# Altium PCB PulseOx_0_PCB.PcbDoc
Units mil, origin at the board's own origin, x right, y up, seen from the top; angles counter-clockwise.
Board outline 3125 x 1501 mil, 2 copper layers (Top Layer, Bottom Layer), stack 61.756 mil thick; 62 components, 46 nets, 194 pads, 48 vias.
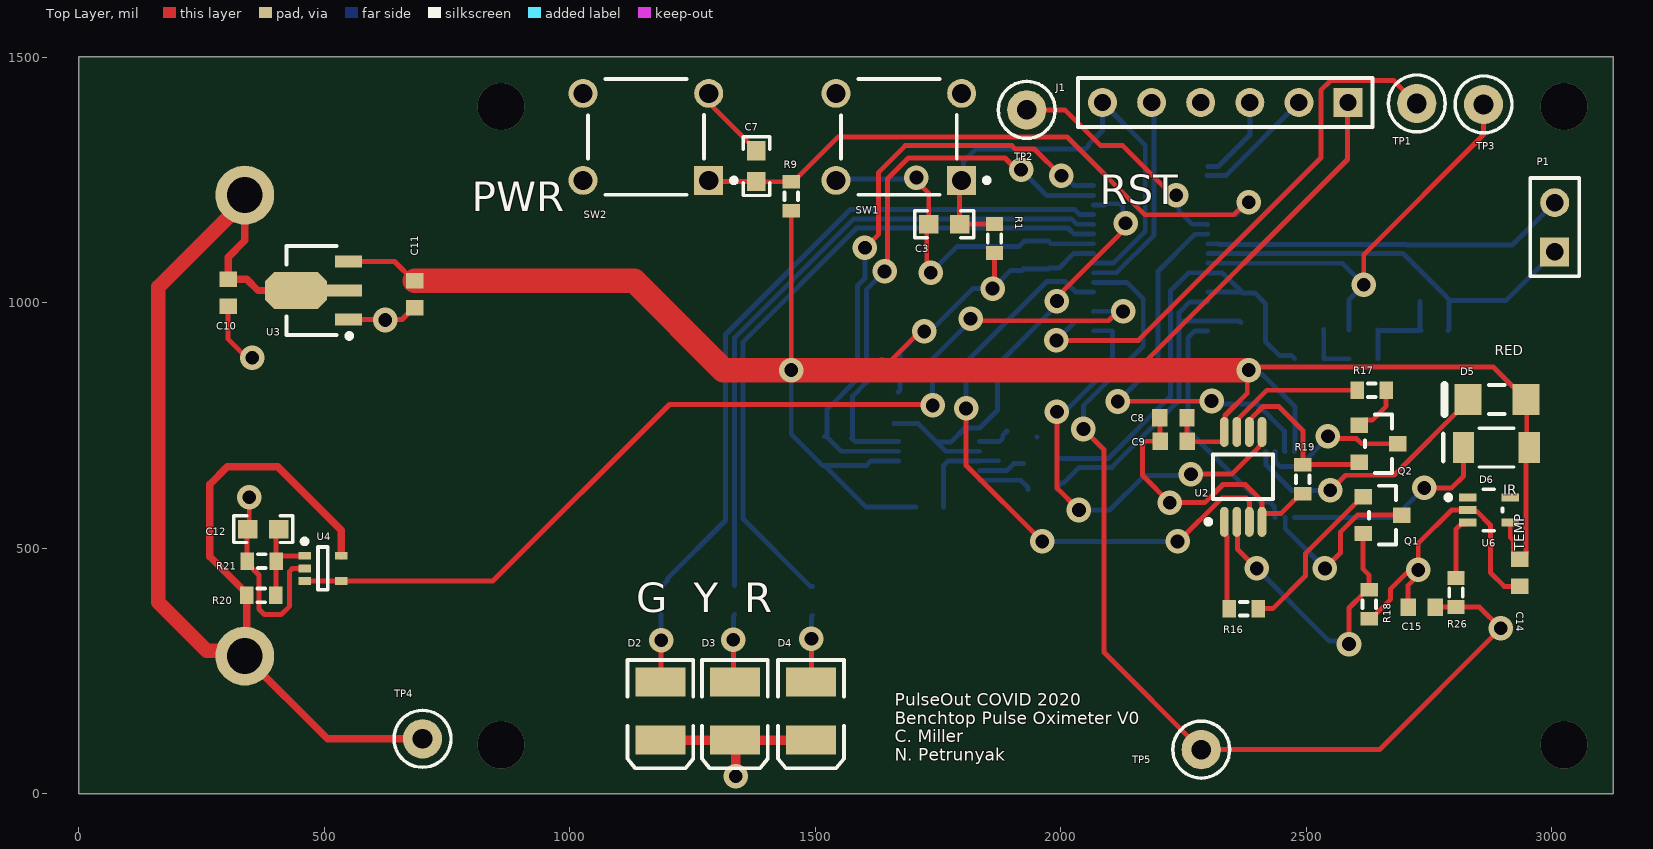
[diagram p0: Top Layer view]
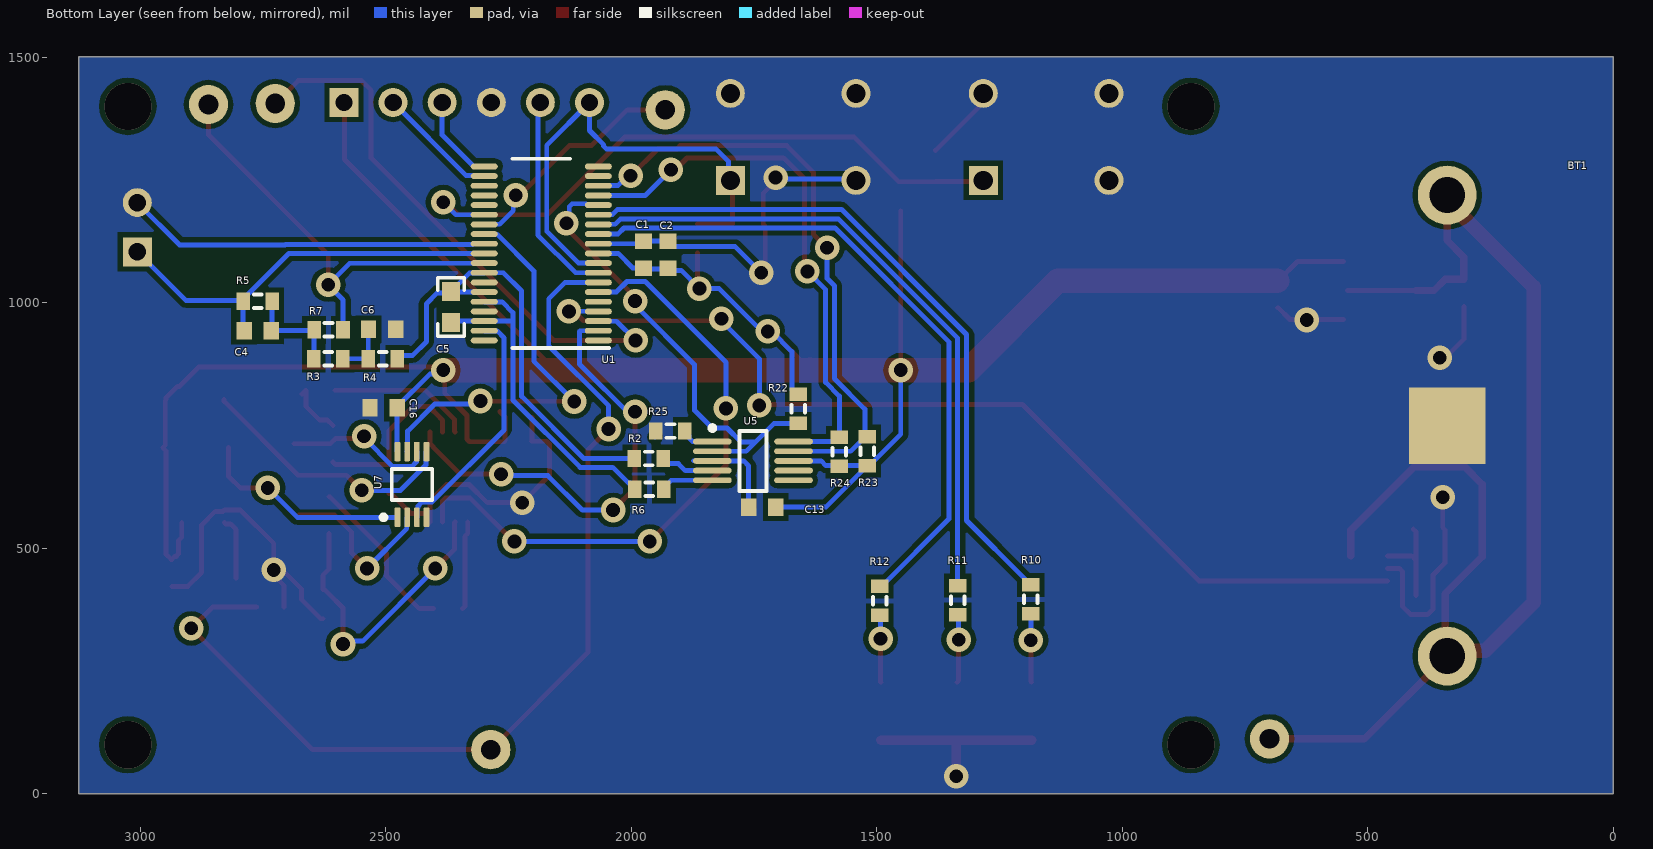
[diagram p1: Bottom Layer view, seen from below]

## Layer stack, top to bottom
Top Solder: solder mask 1, SM-001, Dk 4
Top Layer: signal copper 1.378
Dielectric 1: core 59, Core-043, Dk 4.3
Bottom Layer: signal copper 1.378
Bottom Solder: solder mask 1, SM-001, Dk 4

## Board outline
0,0 0,1501 3125,1501 3125,0

## Design rules (kind name [scope] priority, off if disabled: settings)
Clearance [All] p1: gap=10 ignorepadtopadclearanceinfootprint=FALSE except(0: Arc-Hole Track-Hole SMDPad-Hole THPad-Hole Via-Hole Fill-Hole Poly-Hole Region-Hole Text-Hole; 2: SMDPad-SMDPad; 6: Arc-SMDPad Track-SMDPad; 8: Arc-Arc Arc-Track Track-Track)
PlaneConnect [All] p1: planeconnectstyle=Direct reliefexpansion=20 reliefentries=4 reliefconductorwidth=10 reliefairgap=10
PolygonConnect [All] p1: connectstyle=Direct reliefconductorwidth=10 reliefentries=4 polygonreliefangle="90 Angle" airgapwidth=10
RoutingVias [All] p1: holewidth=12 width=12 viastyle="Through Hole" minholewidth=8 minwidth=12 maxholewidth=8 maxwidth=12
SolderMaskExpansion [All] p1: expansion=4 istentingtop=FALSE
Width [All] p1: maxlimit=50 minlimit=6 preferedwidth=10 minimp=50.000000 maximp=50.000000 favimp=50.000000
29 further rules are at their usual default settings.

## Classes and differential pairs
component class "TX Path": C8 C9 C16 D5 D6 Q1 Q2 R16 R17 R18 R19 U2 U7
component class Power: BT1 C10 C11 C12 R20 R21 TP4 U3 U4
component class Perpherials: C13 C14 C15 R22 R23 R24 R25 R26 TP5 U5 U6
component class Microcontroller: C1 C2 C3 C4 C5 C6 C7 D2 D3 D4 J1 P1 R1 R2 R3 R4 R5 R6 R7 R9 R10 R11 R12 SW1 SW2 TP1 TP2 TP3 U1

## Components (designator, comment, footprint, x,y, rotation, side; value= is the part's Value field where it differs from the comment)
BT1 "3052-2" 3025-2 338,750 r270 bottom locked
C1 "Cap Semi" 1608[0603] 1975,1098 r270 bottom value=0.1uF
C2 "Cap Semi" 1608[0603] 1925,1097.56 r270 bottom value=10uF
C3 "Cap Semi" 0603 1762.5,1160 r0 top value=1.1nF
C4 "Cap Semi" 1608[0603] 2760.87,943.22 r0 bottom value=0.1uF
C5 "Cap Semi" 0603 2367,991.5 r90 bottom value=DNP
C6 "Cap Semi" 1608[0603] 2507.44,946 r180 bottom value=1uF
C7 "Cap Semi" 0603 1380,1278.5 r270 top value=1.1nF
C8 "Cap Semi" 1608[0603] 2229.44,766.03 r0 top value=0.1uF
C9 "Cap Semi" 1608[0603] 2230.44,718.03 r0 top value=0.1uF
C10 "Cap Semi" 1608[0603] 304,1020.44 r90 top value=0.1uF
C11 "Cap Semi" 1608[0603] 684,1017.44 r90 top value=0.1uF
C12 "Cap Semi" 0603 375.66,539 r0 top value=100pF
C13 "Cap Semi" 1608[0603] 1733,584 r180 bottom value=0.1uF
C14 "Cap Semi" 1608[0603] 2935,450 r90 top value=0.1uF
C15 "Cap Semi" 1608[0603] 2735,380 r0 top value=DNP
C16 "Cap Semi" 1608[0603] 2504.44,786 r180 bottom value=0.1uF
D2 "GREEN" 3.5X2.8X1.9 1184.48,168.23 r270 top
D3 "YELLOW" 3.5X2.8X1.9 1336.22,168.23 r270 top
D4 "RED" 3.5X2.8X1.9 1491.22,168.23 r270 top
D5 "BR1102W-TR" STEC-1102W_V 2888,803.13 r180 top
D6 "IR LED" 1206_180 2887,705 r180 top
J1 "Header 6" HDR1X6 2585,1408 r180 top
P1 "Photodiode input" HDR1X2 3006,1104 r90 top
Q1 "FDV301N" FP-318-08-MFG 2655,567.56 r0 top
Q2 "FDV301N" FP-318-08-MFG 2647.08,713 r0 top
R1 "Res3" J1-0603 1865,1131 r270 top value=47k
R2 "Res3" J1-0603 1964,683 r0 bottom value=DNP
R3 "Res3" J1-0603 2617,886 r180 bottom value=4.02k
R4 "Res3" J1-0603 2506,886 r0 bottom value=0
R5 "Res3" J1-0603 2760.87,1003.22 r0 bottom value=2K
R6 "Res3" J1-0603 1963,620 r0 bottom value=DNP
R7 "Res3" J1-0603 2616.47,945 r180 bottom value=0
R9 "Res3" J1-0603 1451,1217 r270 top value=47k
R10 "Res3" J1-0603 1186,396 r90 bottom value=10
R11 "Res3" J1-0603 1335,394.53 r90 bottom value=64.9
R12 "Res3" J1-0603 1494,393 r90 bottom value=64.9
R16 "Res3" J1-0603 2373,377 r180 top value=100
R17 "Res3" J1-0603 2633,822 r180 top value=100
R18 "47.5" J1-0603 2628,386 r90 top
R19 "11.5" J1-0603 2493,641 r90 top
R20 "Res3" J1-0603 371.69,404 r180 top value=10M
R21 "Res3" J1-0603 372.16,474 r0 top value=10M
R22 "Res3" J1-0603 1660,784 r270 bottom value=1k
R23 "Res3" J1-0603 1519,698 r90 bottom value=1k
R24 "Res3" J1-0603 1576,696.47 r90 bottom value=1k
R25 "Res3" J1-0603 1920,739 r0 bottom value=1k
R26 "Res3" J1-0603 2805,410 r90 top value=0
SW1 "1825910-6" TECO-1825910-6_V 1670.12,1338 r180 top
SW2 "1825910-6" TECO-1825910-6_V 1155,1338 r180 top
TP1 "5002" Keystone5002 2725,1406 r0 top value=White
TP2 "5002" Keystone5002 1930.61,1393 r0 top value=White
TP3 "5002" Keystone5002 2861,1404 r0 top value=White
TP4 "5002" Keystone5002 700,112 r0 top value=White
TP5 "5002" Keystone5002 2286,90 r0 top value=White
U1 "MSP430FR2355TDBT" DBT0038A_N 2183.14,1100.57 r0 bottom locked value=Value
U2 "LMV358IDGKR" DGK0008A_M 2371.36,645.46 r90 top
U3 "MCP1700T-5002E/MB" SOT-89-MB3_N 474,1025 r180 top
U4 "MIC920YC5" X5+1_L 497.16,459 r0 top
U5 "ADS1115IDGST" TI-DGS10_M 1752,678 r180 bottom
U6 "TMP235A4DCKR" FP-DCK0005A-MFG 2872,578 r0 top
U7 "SN74LVC2G66DCUR" DCU0008A_M 2446.45,630.07 r90 bottom

## Footprints (in the part's own frame and the unit in brackets; to place one, negate y for a bottom-side part, rotate by r counter-clockwise, add the part's x,y. Pads: shape width x height; smd on the part's side, far side on the other; paste and mask are expansions set on the pad)
3.5X2.8X1.9 [mm] "SM LED; 2 C-Bend Leads; Body 3.5 x 2.8 x 1.9 mm, inc leads (LxWxH typ)"
  rect 1.5x2.6 smd: 1(-1.5,0) 2(1.5,0)
  silkscreen extent -2.65,-1.7 2.95,1.7
0603 [mm] "0603 from SM-752 data"
  rect 1x0.95 smd: 1(-0.8,0) 2(0.8,0)
  silkscreen extent -1.52,-0.69 1.52,0.69, body extent -0.87,-0.47 0.87,0.47, height 1
1206_180 [mm] "1206_180"
  rect 1.1x1.6 smd: 1(-1.7,0) 2(1.7,0)
  silkscreen extent -0.9,-1 0.9,1, body extent -1.75,-0.95 1.75,0.95, height 1.8
1608[0603] [mm] "Chip Capacitor, Body 1.6x0.8mm, IPC High Density"
  rect 0.8x0.9 smd: 1(-0.7,0) 2(0.7,0)
  body extent -0.87,-0.48 0.87,0.48, height 1.3
3025-2 [mil] "BATTERY RETNR COIN 2 CELL PC PIN"
  rect 156x156 smd: 1(0,0)
  round 120 hole 73: 2(-469.5,0) 2(469.5,0)
  body extent -495,-538 508,338, height 327
DBT0038A_N [mm]
  oval 1.4x0.3 smd paste+0 mask+0: 1(-2.95,4.5) 2(-2.95,4) 3(-2.95,3.5) 4(-2.95,3) 5(-2.95,2.5) 6(-2.95,2) 7(-2.95,1.5) 8(-2.95,1) 9(-2.95,0.5) 10(-2.95,0) 11(-2.95,-0.5) 12(-2.95,-1) 13(-2.95,-1.5) 14(-2.95,-2) 15(-2.95,-2.5) 16(-2.95,-3) 17(-2.95,-3.5) 18(-2.95,-4) 19(-2.95,-4.5) 20(2.95,-4.5) 21(2.95,-4) 22(2.95,-3.5) 23(2.95,-3) 24(2.95,-2.5) 25(2.95,-2) 26(2.95,-1.5) 27(2.95,-1) 28(2.95,-0.5) 29(2.95,0) 30(2.95,0.5) 31(2.95,1) 32(2.95,1.5) 33(2.95,2) 34(2.95,2.5) 35(2.95,3) 36(2.95,3.5) 37(2.95,4) 38(2.95,4.5)
  silkscreen extent -3.5,-4.9 1.5,4.9, body extent 0,0 0.25,0.25, height 0.25
DCU0008A_M [mm] "SOP, 8-Leads, Body 2.4x2.1mm, Pitch 0.5mm, IPC Low Density"
  rrect33% 1x0.3 smd: 1(-1.7,0.75) 2(-1.7,0.25) 3(-1.7,-0.25) 4(-1.7,-0.75) 5(1.7,-0.75) 6(1.7,-0.25) 7(1.7,0.25) 8(1.7,0.75)
  silkscreen extent -1.82,-1.05 0.8,1.6, body extent -1.56,-1 1.56,1, height 0.9
DGK0008A_M [mm] "TSOP, 8-Leads, Body 3.1x3.1mm, Pitch 0.65mm, IPC Low Density"
  oval 1.55x0.45 smd: 1(-2.325,0.975) 2(-2.325,0.325) 3(-2.325,-0.325) 4(-2.325,-0.975) 5(2.325,-0.975) 6(2.325,-0.325) 7(2.325,0.325) 8(2.325,0.975)
  silkscreen extent -2.45,-1.55 1.15,1.92, body extent -2.45,-1.5 2.45,1.5, height 0.94
FP-318-08-MFG [mm]
  rect 0.9x0.8 smd paste+0 mask+0: 1(-1,0.95) 2(-1,-0.95) 3(1,0)
  silkscreen extent -0.7,-1.52 0.7,1.52, body extent -1.55,-1.62 1.55,1.62, height 0.25
FP-DCK0005A-MFG [mm]
  rect 0.9x0.4 smd paste-1000 mask+0: 1(-1.1,0.65) 2(-1.1,0) 3(-1.1,-0.65) 4(1.1,-0.65) 5(1.1,0.65)
  silkscreen extent -2.22,-1.07 0.7,1.07, body extent -1.65,-1.33 1.65,1.33, height 0.25
HDR1X2 [mm] "Connector; Header; 2 Position"
  rect 1.5x1.5 hole 0.9: 1(0,0)
  round 1.5 hole 0.9: 2(2.54,0)
  silkscreen extent -1.27,-1.27 3.81,1.27
HDR1X6 [mm] "Connector; Header; 6 Position"
  rect 1.5x1.5 hole 0.9: 1(0,0)
  round 1.5 hole 0.9: 2(2.54,0) 3(5.08,0) 4(7.62,0) 5(10.16,0) 6(12.7,0)
  silkscreen extent -1.27,-1.27 13.97,1.27
J1-0603 [mm] "Chip Resistor, Body 1.6x0.8mm, IPC High Density"
  rect 0.7x0.9 smd: 1(-0.75,0) 2(0.75,0)
  silkscreen extent -0.2,-0.35 0.2,0.35, body extent -0.85,-0.48 0.85,0.48, height 0.9
Keystone5002 [mil]
  round 80 hole 40: 1(0,0)
  silkscreen extent -58,-58 58,58, body extent -49,-49 49,49, height 182
SOT-89-MB3_N [mm] "SOT89, 3-Leads, Body 4.5x2.4 mm, Pitch 1.5mm, Lead Span 4.1mm, IPC Medium Density"
  rect 1.4x0.6 smd: 1(-1.9,1.5) 3(-1.9,-1.5)
  rect 1.8x0.6 smd: 2(-1.7,0)
  oct 3.2x1.9 smd: 2(0.8,0)
  silkscreen extent -2.08,-2.3 1.3,2.47, body extent -1.3,-2.3 1.3,2.3, height 1.6
STEC-1102W_V [mm] "SMD, 2-Leads, Body 3x1.5mm"
  rect 1.4x1.6 smd: 1(-1.5,0) 2(1.5,0)
  silkscreen extent -0.4,-0.75 2.7,0.75, body extent -1.5,-0.75 1.5,0.75, height 1.78
TECO-1825910-6_V [mm] "Switch, 4-Leads, Body 5.99x5.99mm"
  rect 1.5x1.5 hole 0.99: 1(-3.25,2.25)
  round 1.5 hole 0.99: 2(3.25,2.25) 3(-3.25,-2.25) 4(3.25,-2.25)
  silkscreen extent -4.68,-3 3,3, body extent -3,-2.99 2.99,3, height 5
TI-DGS10_M [mm] "SOP, 10-Leads, Body 3x3mm, Pitch 0.5mm, IPC Low Density"
  oval 2x0.3 smd: 1(-2.1,1) 2(-2.1,0.5) 3(-2.1,0) 4(-2.1,-0.5) 5(-2.1,-1) 6(2.1,-1) 7(2.1,-0.5) 8(2.1,0) 9(2.1,0.5) 10(2.1,1)
  silkscreen extent -2.23,-1.55 0.7,1.82, body extent -1.55,-1.55 1.55,1.55, height 1.1
X5+1_L [mm] "SOT353, 5-Leads, Body 2x1.3mm, Pitch 0.65mm, Lead Span 2.1mm, IPC High Density"
  rect 0.65x0.4 smd: 1(-0.95,0.65) 2(-0.95,0) 3(-0.95,-0.65) 4(0.95,-0.65) 5(0.95,0.65)
  silkscreen extent -1.07,-1.1 0.25,1.52, body extent -0.67,-1.1 0.68,1.1, height 1.1

## Part data
BT1: library part 3025-2, "BATTERY RETNR COIN 2 CELL PC PIN", Mfr 1="Keystone Electronics", DigiKey=36-3025-2-ND, Mfr 1 PN=3025-2
C1 C2 C4 C8 C9 C11 C13 C14 C15 C16: "Capacitor (Semiconductor SIM Model)", Voltage=6.3V, LatestRevisionDate=29-May-2009, LatestRevisionNote="IPC-7351 Footprint Added.", PackageDescription="Chip Capacitor", PackageReference=C1206, Published=8-Jun-2000, Publisher="Altium Limited"
  C1 C4 C8 C9 C11 C13 C14 C16: DigiKey=478-06036C104KAT4ACT-ND
  C2: DigiKey=587-6012-1-ND
  C15: DigiKey=DNP
C3 C5 C6 C7 C12: "Capacitor (Semiconductor SIM Model)", LatestRevisionDate=29-May-2009, LatestRevisionNote="IPC-7351 Footprint Added.", PackageDescription="Chip Capacitor", Published=8-Jun-2000, Publisher="Altium Limited"
  C3 C7: DigiKey=490-1452-1-ND, PackageReference=C1206
  C5: DigiKey=DNP, PackageReference=C1206
  C6: DigiKey=399-17700-1-ND, PackageReference=C1206
  C12: DigiKey=478-11846-1-ND, PackageReference=0603
C10: "Capacitor (Semiconductor SIM Model)", Voltage=10V, DigiKey=478-06036C104KAT4ACT-ND, LatestRevisionDate=29-May-2009, LatestRevisionNote="IPC-7351 Footprint Added.", PackageDescription="Chip Capacitor", PackageReference=C1206, Published=8-Jun-2000, Publisher="Altium Limited"
D2 D3 D4: library part LED3, "Typical BLUE SiC LED", DatasheetVersion=16-Apr-2002, LatestRevisionDate=17-Dec-2003, LatestRevisionNote="PCB Footprint replaced.", PackageDescription="SM LED; 2 C-Bend Leads; Body 3.5 x 2.8 x 1.9 mm, inc leads (LxWxH typ)", PackageReference=3.5X2.8X1.9, PackageVersion=16-Apr-2002, Published=8-Jun-2000, Publisher="Altium Limited"
  D2: DigiKey=732-4997-1-ND
  D3: DigiKey=SML-Z14YTT86CCT-ND
  D4: DigiKey=732-5000-1-ND
D5: library part CMP-2000-05961-1, "LED, Red, 647 nm, -30 to 85 degC, 2-Pin SMD, RoHS, Tape and Reel", Emitting Color=Red, Forward Current=30mA, Forward Voltage=2V, Manufacturer="Stanley Electric", Operating Temp Range=-30Cto85C, Operating Temperature Classification=Commercial, Package Description="2-Pin Surface Mounted Device , Body 3 x 1.5 mm", Package Reference=1102W, Package Type=SMD, Power Dissipation=60W, Reverse Voltage=4V, Test Current (It)=20mA, Chip Material=GaAlAs, Datasheet URL=https://datasheet.ciiva.com/34302/1845603-34302809.pdf, Datasheet Version=08/2007, DELETED=Compliant, DigiKey=404-1048-1-ND, Dominant Wave Length=647nm, High Brightness=No, Lens Dimensions=2x1.5x0.9mm, Lum Intensity=33.6mcd, Luminous Intensity=33.6mcd, Main Category=ChipLED, Manufacturer URL=http://www.stanley-electric.com/, Mounting=SurfaceMount, Mounting Technology=SurfaceMount, Number of  Elements=1, Packaging=TapeandReel, Peak Wavelength=660nm, Pin Count=2, Product Depth (mm)=1.5mm, Product Height (mm)=1.5mm, Product Length (mm)=3mm, Rad Hardened=No, Shape Type=Rectangular, Type=Uni-Color, Viewing Angle=70/82deg
D6: library part LED0, "Typical INFRARED GaAs LED", DigiKey=1080-1357-1-ND, LatestRevisionDate=08-Jul-2005, LatestRevisionNote="Mech Layer 1 removed.", PackageDescription="LED; 2 Leads", PackageReference=LED-0, Published=8-Jun-2000, Publisher="Altium Limited"
J1: "Header, 6-Pin", DigiKey=ED7264-06-ND, LatestRevisionDate=17-Jul-2002, LatestRevisionNote="Re-released for DXP Platform.", Publisher="Altium Limited"
P1: library part "Header 2", "Header, 2-Pin", LatestRevisionDate=17-Jul-2002, LatestRevisionNote="Re-released for DXP Platform.", Publisher="Altium Limited"
Q1 Q2: library part CMP-07173-000062-1, "MOSFET N-CH 25V 220MA SOT-23", Continuous Drain Current=0.22A, Drain To Source Breakdown Voltage=25V, Drain To Source Resistance=3.1Ω, Gate To Source Voltage=8V, Input Capacitace At Vds="9.5pF @ 10V", Manufacturer="ON Semiconductor", Max Forward Diode Voltage=1.2V, Max Junction Temp=+150°C, Package=318-08, Power Dissipation=0.35W, Temperature="-55°C to +150°C", Temperature Range Low=-55°C, Typ Forward Diode Voltage=0.8V, Automotive=No, Category=Trans, ComponentLink2Description=Datasheet, ComponentLink2URL=https://www.onsemi.com/pub/Collateral/FDV301N-D.PDF, Depletion Mode=False, Device Class L1="Discrete Semiconductors", Device Class L2=Transistors, Device Class L3=MOSFETs, DigiKey=FDV301NCT-ND, Digikey Description="MOSFET N-CH 25V 220MA SOT-23", Drain To Source Voltage=25V, Footprint Url=https://www.onsemi.com/pub/Collateral/318-08.PDF, Gate Charge At Vgs="0.49nC @ 4.5V", Height=1.11mm, Ipc Land Pattern Name=SOT95P240X100-3, Lead Free=Yes, Manufacturer Part Number=FDV301N, Mouser Description="MOSFET N-Ch Digital", Number Of Channels=1, Number Of N Channels=1, Octopart=https://octopart.com/fdv301n-on+semiconductor-84326713, RoHS=TRUE, Rthja Max=357°C/W, Standoff Height=0.01mm, Temperature Range High=+150°C, Threshold Vgs Max=1.06V, Threshold Vgs Min=0.7V, Transconductance=0.2S, Turn Off Delay Time=3.5ns, Turn On Delay Time=3.2ns
R1 R2 R3 R4 R5 R6 R7 R9 R10 R11 R12 R16 R17 R20 R21 R22 R23 R24 R25 R26: "Resistor", LatestRevisionDate=29-May-2009, LatestRevisionNote="IPC-7351 Footprint Added.", PackageDescription="Chip Resistor", PackageReference=J1-0603, Published=8-Jun-2000, Publisher="Altium Limited"
  R1 R9: DigiKey=311-47KGRCT-ND
  R2 R6: DigiKey=DNP
  R3: DigiKey=RMCF0603FT4K02CT-ND
  R4 R7 R26: DigiKey=311-0.0GRCT-ND
  R5: DigiKey=311-2.00KHRCT-ND
  R10: DigiKey=311-10.0HRCT-ND
  R11 R12: DigiKey=P64.9DBCT-ND
  R16 R17: DigiKey=P100BYCT-ND
  R20 R21: DigiKey=P10MGCT-ND
  R22 R23 R24 R25: DigiKey=311-1.00KHRCT-ND
R18 R19: library part Res3, "Resistor", LatestRevisionDate=29-May-2009, LatestRevisionNote="IPC-7351 Footprint Added.", PackageDescription="Chip Resistor", PackageReference=J1-0603, Published=8-Jun-2000, Publisher="Altium Limited"
  R18: DigiKey=311-47.5HRDKR-ND
  R19: DigiKey=P11.5HCT-ND
SW1 SW2: library part CMP-1684-00021-1, "Tact Switch, SPST-NO, 0.05 A, -35 to 85 degC, 4-Pin THD, RoHS, Bulk", Actuator Color=Black, Contact Rating @ Voltage=0.05A@24VDC, Dielectric Strength=500VAC, Manufacturer="TE Connectivity", Maximum AC Voltage Rating=N/A, Maximum Contact Resistance=100mOhm, Maximum DC Voltage Rating=24V, Minimum Insulation Resistance=100MOhm, Operating Temperature=-35to85C, Package Description="4-Pin Through Hole Device, Body 5.99 x 5.99 mm, Pitch 6.5 mm", Package Reference=THD, Actuator Length=1.4mm, Actuator Material=PolybutyleneTerephthalate, Actuator Style=RoundButton, Base Material=N/A, Body Orientation=Straight, Bushing Type=Unthreaded, Contact Material=CopperAlloy, Contact Plating=Silver, Datasheet URL=http://www.te.com/commerce/DocumentDelivery/DDEController?Action=showdoc&DocId=Customer+Drawing%7F1825910%7FC9%7Fpdf%7FEnglish%7FENG_CD_1825910_C9.pdf%7F1825910-6, Datasheet Version="Rev. C9", DigiKey=450-1650-ND, Dimension=5.99x5mm, Electrical Life=100000Cycles, Family=1825910, Function=MomentaryContact, Housing Material=N/A, Illumination=N/R, Manufacturer URL=http://www.te.com, Mechanical Life=100000Cycles, Mounting=ThroughHole, Packaging=N/A, Part No=1825910-6, Pole Throw Configuration=SPST, Product Weight=N/A, RoHS=Yes, Seal Description=N/A, Seal Location=N/A, Switch Configuration=OFF(ON), Terminal Type=PCPins, Thread Size=N/R
TP1 TP2 TP3 TP4 TP5: "Test Point, Miniature, White, TH", Manufacturer=Keystone, ComponentLink1Description="Datasheet Link", ComponentLink1URL=http://www.keyelco.com/userAssets/file/M60-2p60.pdf, CompType="Test Point Loop", DigiKey=36-5002-ND, LatestRevisionDate=2015-08-25, MountType=TH, PackageReference="White Miniature Testpoint", PartNumber=5002, Publisher="Texas Instruments", RoHS=Y, Supplier 1=Digi-Key, Supplier 2=Newark, Supplier Part Number 2=82H9632, SymbolVersion=2008-04-04, U/M=EA
U1: "MSP430 IC", Manufacturer="Texas Instruments", PartNumber=MSP430FR2355IDBT, Supplier Part Number 1=296-50259-1-ND, Copyright="Copyright (C) 2018 Accelerated Designs. All rights reserved", DigiKey=296-50259-1-ND, RefDes=RefDes, Supplier 1=Digi-Key, Type=DEV
U2: library part CMP-2100-03651-1, "Low-Voltage Rail-to-Rail Output Operational Amplifier, 2.7 to 5.5 V, -40 to 125 degC, 8-Pin VSSOP (DGK), Green (RoHS & no Sb/Br), Tape and Reel", Case/Package=MSOP, Input Bias Current=250nA, Input Offset Voltage (Vos)=7mV, Manufacturer="Texas Instruments", Max Operating Temperature=85degC, Max Supply Voltage=5.5V, Min Operating Temperature=-40degC, Min Supply Voltage=2.7V, Nominal Supply Current=440uA, Operating Supply Current=210uA, Output Current=160mA, Package Description="8-Pin Thin Small Outline Package, Body 3 x 3 mm, Pitch 0.65 mm", Package Quantity=1, Package Reference=DGK0008A, Supply Voltage=5V, Voltage Gain=100dB, Bandwidth=1MHz, Common Mode Rejection Ratio=50dB, Contact Plating=Gold, Datasheet URL=http://www.ti.com/lit/ds/symlink/lmv358.pdf, Datasheet Version="SLOS263W, 10/2014", DigiKey=LMV358SG-13DICT-ND, Gain Bandwidth Product=1MHz, Height=0.97mm, Lead Free=LeadFree, Length=3mm, Manufacturer URL=http://www.ti.com/, Mount=SurfaceMount, Number of Amplifiers=2, Number Of Channels=2, Number of Circuits=2, Number of Elements=2, Number of Pins=8, Output Current per Channel=160mA, Package URL=http://www.ti.com/litv/pdf/mpds028d, Packaging=TapeandReel, Radiation Hardening=No, REACH SVHC=NoSVHC, RoHSCompliant=true, Slew Rate=1V/us, Unity Gain Bandwidth Product=1MHz, Width=3mm
U3: library part CMP-0136-00868-1, "Low Quiescent Current LDO, 3-Pin SOT-89, Extended Temperature, Tape and Reel", Code_IPC=SOT89, DatasheetVersion="revB, Feb-2007", DigiKey=MCP1700T5002EMBCT-ND, PackageDescription="3-Lead Plastic Small Outline Transistor Header (MB) [SOT-89]", PackageReference=SOT-89-MB3, PackageVersion="revBB, Aug-2009"
U4: library part CMP-0252-00510-1, "High-Output-Drive, Rail-to-Rail I/O Op Amps with Shutdown, 10 MHz, 10 V/us, 2.7 to 5.5 V, -40 to 125 degC, 5-Pin SC70 (X5+1), RoHS, Tape and Reel", Manufacturer=Microchip, PartNumber=MIC920YC5-TR, Temperature Range="-40 to 125 degC", ComponentLink2Description=Datasheet, ComponentLink2URL=http://ww1.microchip.com/downloads/en/DeviceDoc/MIC920-80MHz-Low-Power-SC70-Op-Amp-DS20006268A.pdf, DigiKey=576-4560-1-ND, Gain Bandwidth="80 MHz Typ.", Mounting Technology="Surface Mount", Packing="Tape and Reel", RoHS=TRUE, VDD="2.5 to 9 V"
U5: library part CMP-0003-00378-2, "16-Bit ADC with Integrated Multiplexer, PGA, Comparator, Oscillator, and Reference, -40 to 125 degC, 10-pin SOP (DGS10), Green (RoHS & no Sb/Br)", Analog Voltage AV/DD(Max)(V)=5.5, Analog Voltage AV/DD(Min)(V)=2, Manufacturer="Texas Instruments", # Input Channels=4, Architecture=Delta-Sigma, Code_JEDEC=MO-153, ComponentLink1Description="Manufacturer URL", ComponentLink1URL=http://www.ti.com/, ComponentLink2Description=Datasheet, ComponentLink2URL=http://www.ti.com/general/docs/lit/getliterature.tsp?genericPartNumber=ADS1115&fileType=pdf, ComponentLink3Description="Package Specification", ComponentLink3URL=http://www.ti.com/lit/ml/mpds035b/mpds035b.pdf, DatasheetVersion=SBAS444B, DigiKey=296-38849-1-ND, Digital Supply(Max)(V)=5.5, Digital Supply(Min)(V)=2, Eco-Plan="Green (RoHS & no Sb/Br)", INL(Max)(+/-LSB)=1, Interface="Serial I2C", Mounting Technology="Surface Mount", PackageDescription="10-Pin Plastic Small Outline, Body 3 x 3 mm, Pitch 0.5 mm", PackageReference=DGS10, PackageVersion="4073272/C, 02/2004", PartNumber=ADS1115IDGST, Resolution(Bits)=16, Sample Rate (max)(SPS)=860, SubFamily="Precision ADC (<=10MSPS)"
U6: library part CMP-04948-000022-1, "SENSOR ANALOG -40C-150C SC70-5", Ambient Temperature Range High=+150°C, Ambient Temperature Range Low=-40°C, Manufacturer="Texas Instruments", Max Supply Voltage=5.5V, Min Supply Voltage=2.3V, Operating Supply Current=9-10uA, Output Current=500uA, Output Voltage=100-2000mV, Package=DCK0005A, Temperature="-40°C to +150°C", Automotive=No, Category=IC, ComponentLink2Description=Datasheet, ComponentLink2URL=https://www.ti.com/lit/ds/symlink/tmp235.pdf, Device Class L1=Sensors, Device Class L2="Temperature and Humidity Sensors", Device Class L3=unset, Digikey Description="SENSOR ANALOG -40C-150C SC70-5", Height=1.1mm, Lead Free=Yes, Manufacturer Part Number=TMP235A4DCKR, Max Junction Temp=+150°C, Mouser Description="±2.5°C Analog output temperature sensor, with 10mV /°C gain 5-SC70 -40 to 150", Octopart=https://octopart.com/tmp235a4dckr-texas+instruments-88184449, RoHS=TRUE, Sensor Output="Analog Voltage", Standoff Height=0mm, Temperature Range High=+150°C, Temperature Range Low=-40°C
U7: library part CMP-0859-00645-3, "Dual Analog Switch, DCU0008A, LARGE T&R", F @ Nom Voltage(Max)(Mhz)=150, Generic Part Number=SN74LVC2G66, ICC @ Nom Voltage(Max)(mA)=0.01, Manufacturer="Texas Instruments", Operating Temperature Range(C)="-40 to 85", Rating=Catalog, tpd @ Nom Voltage(Max)(ns)=2,1.2,0.8,0.6, Voltage(Nom)(V)=1.8,2.5,3.3,5, 3-State Output=No, Bits(#)=2, Channels(#)=2, DatasheetVersion=SCES325K, DigiKey=296-13272-1-ND, Input Type=CMOS, Logic=True, Output Drive (IOL/IOH)(Max)(mA)=32/-32, Output Type=CMOS, PackageReference=DCU0008A, Schmitt Trigger=No, Sub-Family="Analog Switch", Switch Configuration=SPST, Technology Family=LVC, VCC(Max)(V)=5.5, VCC(Min)(V)=1.65

## Via types
v1: diameter 50, hole 28, Top Layer to Bottom Layer, 44 vias
v2: diameter 96, hole 96, Top Layer to Bottom Layer, 4 vias

## Nets (pads, with @x,y where several pads share a name; then routed paths per layer and width w, separated by ;. In a path a pad name is that pad's centre, name@x,y a point inside that pad or via, vN(x,y) a via of type N, cw(c..) or ccw(c..) an arc to the next point about the centre after c; other vN are vias at no path point)
+3.3: C1.2 C2.2 C8.2 C9.2 C11.2 C13.2 C14.2 C16.2 D5.1 D6.1 J1.1 R1.2 R9.2 R22.1 R23.1 R24.1 U1.10 U2.8 U3.3 U5.8 U6.4 U7.8 | length 5824.6
  Top Layer w10: U3.3 642.98,1084.06 682.03,1045 C11.2 ; v1(1451,863) R9.2 ; 1635.5,863.5 1713.72,941.72 v1(1721.72,941.72) ; v1@1865,1029 R1.2 ; 2155.86,863.86 2584,1292 2584,1407 J1.1 ; C8.2@2267.75,778.75 2257,768 2257,719.03 2259.03,717 2329.41,717 2334.45,722.04 2334.45,770.45 2379.72,815.72 2379.72,859.72 v1(2383,863) ; v1@2383,869 2881.18,869 2920.56,829.62 2924.5,829.62 2947.06,807.07 D5.1 2949.06,801.13 2949.06,709.87 D6.1 2947.72,698.79 2947.72,488.31 2936.97,477.56 C14.2 ; U6.4 2915.31,522.41 2922.28,515.43 2922.28,488.31 2927.18,483.41 C14.2@2930.57,483.41
  Top Layer w50: C11.2 1131,1045 1313,863 v1(1451,863) 1636,863 ; 1635.5,863.5 1636,863 ; v1(2383,863) 2246,863 2155.86,863 1636,863
  Bottom Layer w10: v1(1451,863) 1451,732.53 1515.06,668.47 R23.1 ; R22.1@1668.33,817.92 1672.72,822.31 1672.72,900.72 1713.72,941.72 v1(1721.72,941.72) ; U5.8 1613,678 1603.47,668.47 R23.1 ; C13.2 1603.47,584 R23.1 ; 1746,954 1821,1029 v1(1861,1029) 1898.14,1066.14 1921.14,1066.14 C2.2 1926,1069 1973.56,1069 C1.2 1975.56,1071 1997,1071 2026.57,1100.57 U1.10 ; v1(2383,863) 2390.65,855.35 2409.5,855.35 2476.88,787.97 C16.2 ; U7.8 2476.63,697.64 C16.2@2476.63,782.66
GND: BT1.1 C1.1 C2.1 C3.1 C6.2 C7.1 C8.1 C9.1 C10.1 C11.1 C12.1 C13.1 C14.1 C15.1 C16.1 D2.2 D3.2 D4.2 J1.4 P1.2 R18.1 R19.1 R21.1 R25.2 SW1.2 SW1.3 SW1.4 SW2.2 SW2.3 SW2.4 U1.11 U1.28 U2.4 U3.1 U4.2 U5.3 U6.2 U7.4 | length 4141.5
  Top Layer w10: C10.1 304,926.18 342.18,888 v1(353,888) ; v1(347.16,604) 347.16,541.99 C12.1 342.63,537.46 342.63,470.06 366.94,445.75 366.94,376.17 378.26,364.86 411.86,364.86 429.23,382.23 429.23,453.14 435.09,459 U4.2 ; U3.1 658.09,965.94 682.03,989.88 C11.1 ; SW2.3 1292.34,1417.2 1292.34,1398.64 1380,1310.98 C7.1 ; D3.2 D3.2@1338,107.39 ; v1(1706,1255) 1706,1248.43 1731,1223.43 C3.1 1727,1156 1727,1079.82 1735,1071.82 v1(1735,1061) ; C8.1 2201.88,719.03 C9.1 2172.13,718.03 2166.28,712.17 2166.28,648.72 v1(2222,593) 2293.24,593 2330.24,630 2376,630 2409.47,596.53 U2.4@2409.47,570.58 ; U2.4 2409.74,567.02 2413.31,570.58 2448.17,570.58 2489.06,611.47 R19.1 ; R18.1 2631.94,356.47 2671.8,396.34 2671.8,417.26 2702.89,448.35 2720.35,448.35 v1(2728,456) ; C15.1 2707.44,424.62 2728,445.18 v1(2728,456) ; C14.1 2903.06,422.44 2875.09,450.41 2875.09,547.16 2847.12,575.13 2831.57,575.13 U6.2 2796.03,578 2728,509.97 v1(2728,456)
  Top Layer w20: D2.2 D3.2 D4.2 ; v1(1338,36) D3.2@1338,107.39
  Bottom Layer w10: SW1.2 1544.96,1252.21 1703.21,1252.21 v1(1706,1255) ; v1(1735,1061) 1788.37,1114.37 1914.25,1114.37 1925.44,1125.56 C1.1 ; C13.1 1761,584.44 1761,668 1771,678 U5.3 1835.02,678.35 U5.3@1872.71,678.35 ; R25.2@1951.06,727 R25.2@1951.77,726.28 ; C1.1@1979.42,1120.26 U1.11 ; U1.28 2321.43,1120.26 2323.11,1118.57 2704.44,1118.57 2705.01,1118 2920,1118 P1.2
  other v1: 624,965
GREEN_LED: R10.2 U1.14 | length 1426.6
  Bottom Layer w10: R10.2 1189.94,425.53 1198.72,434.31 1198.72,438.24 1317,556.53 1317,935.48 1571.74,1190.22 2027.69,1190.22 2038.25,1179.66 2066.65,1179.66 U1.14
IR_DAC_OUT: U1.6 U2.3 | length 1269.9
  Top Layer w10: v1(1807,785) 1807,669 v1(1962,514) ; v1(2237.8,514) 2239.7,514 2327.95,602.25 2378.29,602.25 2384.15,596.39 U2.3
  Bottom Layer w10: v1(1807,785) 1807,879 1971.5,1043.5 2008.57,1043.5 2029.89,1022.18 2066.65,1022.18 U1.6 ; v1(1962,514) v1(2237.8,514)
IR_PWM_OUT: U1.27 U7.7 | length 842.1
  Top Layer w10: v1(2116,799) 2116.5,799.5 2306.5,799.5 v1(2307,800)
  Bottom Layer w10: v1(2116,799) 2198.36,881.36 2198.36,1064.89 2273.06,1139.6 2298.94,1139.6 U1.27 ; v1(2307,800) 2307,797.7 2306.25,796.95 2309.2,794 2400,794 2455.39,738.61 2455.39,697.9 U7.7
LP_OUT_GSA_IN: C5.2 R2.2 R4.1 U1.31 U1.33 | length 951.7
  Bottom Layer w10: R2.2 2096.57,683 2223,809.43 2223,1024 2260.2,1061.2 U1.31 2299.63,1060.86 2329.13,1060.86 2352.31,1037.68 2353.3,1037.68 2367,1023.98 C5.2 ; U1.33 2365.84,1021.83 C5.2 ; R4.1 2469.47,893 2445,893 2417,921 2417,998 2394.84,1020.16 2369.83,1020.16 C5.2
NetC4_1: C4.1 R3.1 R5.1 R7.1 | length 207.7
  Bottom Layer w10: R7.1 R7.1@2646.26,944.74 ; R3.1 2646.26,886.26 R7.1@2646.26,944.74 ; R5.1 2731.35,945.19 C4.1 2647.78,943.22 R7.1@2646.26,944.74
NetC6_1: C6.1 R3.2 R4.2 | length 112.2
  Bottom Layer w10: C6.1 2535.53,945.47 R4.2 R3.2
NetC12_2: C12.2 R20.1 R21.2 U4.1 | length 199.2
  Top Layer w10: R20.1 401.45,404.24 401.45,475.57 R21.2@401.69,475.81 ; C12.2 401.69,533.53 R21.2@401.69,475.81 ; U4.1 410.47,484.59 R21.2@401.69,475.81
NetC15_2: C15.2 R26.1 TP5.1 U1.7 | length 2049.9
  Top Layer w10: v1(2046,743) 2088,701 2088,288 TP5.1 2649,90 v1(2896,337) 2852.53,380.47 R26.1 2763.03,380.47 C15.2
  Bottom Layer w10: v1@2036,744 2046,754 2046,790 2168,912 2168,1008 2134.48,1041.52 U1.7
NetD2_1: D2.1 R10.1 | length 139.8
  Top Layer w10: D2.1 1186,228.81 v1(1186,313)
  Bottom Layer w10: v1(1186,313) R10.1
NetD3_1: D3.1 R11.1 | length 139.9
  Top Layer w10: v1(1333,314) 1333,230.51 D3.1
  Bottom Layer w10: v1(1333,314) 1333,363 R11.1
NetD4_1: D4.1 R12.1 | length 137.3
  Top Layer w10: D4.1 1492,228.07 v1(1492,316)
  Bottom Layer w10: v1(1492,316) 1492,361.47 R12.1
NetD5_2: D5.2 U7.5 | length 539
  Top Layer w10: v1(2549,618) 2579.85,648.85 2678.6,648.85 2828.94,799.19 D5.2
  Bottom Layer w10: U7.5 2417.83,696.09 2417.83,670 2469.83,618 v1(2549,618)
NetD6_2: D6.2 U7.1 | length 436.8
  Top Layer w10: v1(2740,623) 2796,623 2820.07,647.07 D6.2
  Bottom Layer w10: U7.1 2680.14,563.14 v1(2740,623)
NetQ1_1: Q1.1 R16.1 | length 334.2
  Top Layer w10: R16.1 2431.31,377 2498,443.69 2498,489.3 2613.66,604.96 Q1.1
NetQ1_2: Q1.2 R18.2 U2.2 | length 613.2
  Top Layer w10: U2.2 2358.43,553.79 2359.77,552.45 2359.77,498.23 v1(2399,459) ; v1(2587,304.94) 2587,378.46 2618.69,410.15 2624.06,415.53 R18.2 2628,445 2615.63,457.37 Q1.2
  Bottom Layer w10: v1(2399,459) 2547,311 2580.94,311 v1(2587,304.94)
NetQ1_3: Q1.3 U7.2 | length 346.2
  Top Layer w10: v1(2538,459) 2569.51,490.51 2569.51,533.05 2604.01,567.56 2676.37,567.56
  Bottom Layer w10: U7.2 2457.2,562.23 2457.2,539.8 v1(2538,459)
NetQ2_1: Q2.1 R17.1 | length 115
  Top Layer w10: Q2.1 2618.46,761.15 2634.39,761.15 2662.53,789.28 R17.1 R17.1@2670.53,814
NetQ2_2: Q2.2 R19.2 U2.6 | length 350.9
  Top Layer w10: U2.6 2384.15,760.74 2389.88,766.47 2389.88,766.88 2411.79,788.78 2444.22,788.78 2493,740 R19.2 2602.64,670.53 Q2.2
NetQ2_3: Q2.3 U7.6 | length 308
  Top Layer w10: v1(2544,728) 2548.35,723.65 2601.98,723.65 2612.63,713 Q2.3
  Bottom Layer w10: U7.6 2436.61,683.22 2437.52,682.31 2437.52,675.77 2446.98,666.31 2485.3,666.31 2544,725.01 v1(2544,728)
NetR2_1: R2.1 U5.4 | length 95
  Bottom Layer w10: U5.4 1889.74,658.31 1903.82,672.39 R2.1@1923.87,672.39
NetR6_1: R6.1 U5.5 | length 108.8
  Bottom Layer w10: U5.5 1918.78,638.63 1933.47,623.94 R6.1
NetR16_2: R16.2 U2.1 | length 181.3
  Top Layer w10: U2.1 2332.97,530.19 2338.7,524.45 2338.7,381.77 R16.2
NetR17_2: R17.2 U2.7 | length 294.3
  Top Layer w10: U2.7 2360.04,738.48 2360.04,762.62 2419.42,822 R17.2
NetR22_2: R22.2 U1.15 U5.2 | length 937
  Top Layer w10: v1(1992,1003.5) 1992,1011.5 2132,1151.5 v1(2132,1162)
  Bottom Layer w10: R22.2 1708.99,754.47 1747.23,716.23 ; U5.2 1765.78,697.69 1747.23,716.23 ; v1(1992,1003.5) 1992,995 1871,874 1871,781 1835,745 1804.94,745 1776.17,716.23 1747.23,716.23 ; U1.15 2089.14,1199 2091.92,1201.78 2120.37,1201.78 2126.23,1195.92 2126.23,1167.77 v1(2132,1162)
NetR23_2: R23.2 U1.17 U5.9 | length 1239.3
  Top Layer w10: v1(1601,1112) 1629,1140 1629,1266 1683,1320 1900.37,1320 1906.98,1313.38 1946.07,1313.38 2000.77,1258.68 v1(2001.34,1258.68)
  Bottom Layer w10: R23.2 R23.2@1522.94,727.53 ; v1(1601,1112) 1601,1049.46 1586,1034.46 1586,845.46 1524,783.46 1524,728.59 R23.2@1522.94,727.53 ; U5.9 1552.78,697.69 R23.2@1522.94,727.53 ; v1(2001.34,1258.68) 2007.23,1258.68 2027.2,1238.72 2066.65,1238.72 U1.17
NetR24_2: R24.2 U1.16 U5.10 | length 1123.2
  Top Layer w10: v1(1641,1064) 1647,1070 1647,1252.57 1689.43,1295 1886.43,1295 1910.43,1271 v1(1919,1271)
  Bottom Layer w10: R24.2@1574.03,724.03 1580.35,717.72 1668.98,717.72 U5.10 ; R24.2 1576,810 1604,838 1604,1027 v1(1641,1064) ; v1(1919,1271) 1971.32,1218.68 U1.16
NetR25_1: R25.1 U5.1 | length 68.3
  Bottom Layer w10: U5.1 1835.02,717.72 1875.28,717.72 1881.69,724.13 1881.69,730.22 R25.1
NetR26_2: R26.2 U6.3 | length 128.7
  Top Layer w10: R26.2 2804.69,439.84 2804.69,538.25 2815.98,549.54 2825.82,549.54 U6.3
NetTP1_1: TP1.1 U1.3 | length 1145.4
  Top Layer w10: v1(1991,923.5) 2158.07,923.5 2529.53,1294.96 2529.53,1432.8 2549.26,1452.53 2678.47,1452.53 TP1.1
  Bottom Layer w10: v1(1991,923.5) 2029.93,962.43 2066.65,962.43 U1.3
NetTP2_1: TP2.1 U1.26 | length 500.8
  Top Layer w10: TP2.1 2008,1393 2081,1320 2126,1320 2226.69,1219.31 v1(2235,1219.31) v1@2220.86,1205.14
  Bottom Layer w10: v1(2235,1219.31) 2240.13,1214.19 2240.13,1187.87 2268.02,1159.98 2298.94,1159.98 U1.26
NetU1_4: U1.4 U4.3 U4.4 | length 2021.3
  Top Layer w10: U4.3 U4.4 843.41,433.41 1203,793 1722,793 v1@1737,808 ; v1(1816.28,967.72) 1820.5,963.5 2097.03,963.5 2115.99,982.46 v1(2126.82,982.46)
  Bottom Layer w10: v1(1739,791) 1739,886 1816.28,963.28 v1(1816.28,967.72) ; U1.4 2067.31,982.77 2126.51,982.77 v1(2126.82,982.46)
PHOTO-: C4.2 P1.1 R5.2 U1.29 | length 848
  Bottom Layer w10: U1.29 2696.98,1100.57 2781.62,1015.94 2790.4,1007.16 R5.2 2792.18,1005 2907,1005 2981.47,1079.47 P1.1 ; C4.2 2790.4,945.19 R5.2@2790.4,999.28
PWR_ON: C7.2 R9.1 SW2.1 U1.25 | length 1309.9
  Top Layer w10: SW2.1 1285.37,1247 C7.2 1380.47,1246.53 1454.94,1246.53 1546.41,1338 2012.57,1338 2171.25,1179.31 2352.12,1179.31 2377.8,1205 v1(2383,1205)
  Bottom Layer w10: U1.25 2357.31,1179.31 v1(2383,1205)
RED_DAC_OUT: U1.2 U2.5 | length 946.7
  Top Layer w10: v1(1992,778) 1992,623 v1(2037,578) ; v1(2265,651) 2347.89,651 2404.01,707.12 2404.01,707.53 2409.74,713.26 U2.5
  Bottom Layer w10: v1(1992,778) 1992,776.18 1999.18,769 2105.56,875.38 2105.56,941.61 2104.08,943.09 U1.2 ; v1(2037,578) 2099.7,578 2169.7,648 v1@2273.72,648
RED_LED: R12.2 U1.12 | length 1373.9
  Bottom Layer w10: R12.2 1490.06,422.53 1353,559.59 1353,920.57 1584.74,1152.31 2014.69,1152.31 2027.06,1139.94 U1.12
RED_PWM_OUT: U1.37 U7.3 | length 497.3
  Bottom Layer w10: U1.37 2298.94,942.75 2273.06,942.75 2259,928.69 2259,740.75 2405.93,593.82 2426.25,593.82 2433.83,586.24 2433.83,583.3 2435.71,581.42 2435.71,564.05 U7.3
RST_SBWTDIO: C3.2 J1.6 R1.1 SW1.1 U1.9 | length 1000.8
  Top Layer w10: SW1.1 1793.99,1245.34 C3.2 1794.52,1160.53 R1.1
  Bottom Layer w10: SW1.1 1802.09,1253.43 1802.09,1288.09 1827,1313 2050.14,1313 2056,1318.86 2056,1321.93 2085,1350.93 J1.6 2172,1321 2172,1145.43 2107.8,1081.23 2067.35,1081.23 U1.9
SBWTCK: J1.5 U1.8 | length 426.9
  Bottom Layer w10: U1.8 2113.23,1061.2 2190,1137.98 2190,1403 J1.5
SPO2_MAIN: C5.1 R6.2 U1.34 U1.36 | length 698.8
  Bottom Layer w10: R6.2 1992.53,623.94 2001.31,632.72 2005.24,632.72 2037.53,665 2104.02,665 2241,801.98 2241,962.88 ; U1.34 2298.94,1001.8 2262.8,1001.8 2241,980 2241,962.88 ; C5.1 2364.22,962.78 U1.36 2299.18,962.88 2241,962.88
TIA_OUT: R7.2 TP3.1 U1.30 | length 912.9
  Top Layer w10: v1(2617,1037) 2617,1098 2861,1342 TP3.1
  Bottom Layer w10: U1.30 2299.67,1080.5 2573.5,1080.5 v1(2617,1037) v1@2606.81,1037 ; R7.2 2586.94,1006.3 2609.35,1028.71 v1@2609.35,1034.47
UART_RX: J1.2 U1.21 | length 251.5
  Bottom Layer w10: U1.21@2299.63,1257.71 U1.21 2297.67,1259.67 2336.67,1259.67 J1.2
UART_TX: J1.3 U1.20 | length 178.4
  Bottom Layer w10: U1.20 2320.94,1277.74 2385,1341.8 J1.3
Vbat: BT1.2 C10.2 R20.2 TP4.1 U3.2 U4.5 | length 2785.3
  Top Layer w10: BT1.2@311,1219 338,1219 BT1.2@338,1219.5 ; BT1.2@329.5,289 336.16,282.34 338,280.5 BT1.2@342.16,284.66 ; U3.2@401.65,1025 U3.2@540.93,1025
  Top Layer w15: BT1.2@338,280.5 506.5,112 TP4.1 ; BT1.2@338,1219 338,1127 304,1093 C10.2 341.81,1048 364.81,1025 U3.2@401.65,1025 ; BT1.2@342.16,284.66 342.16,407.94 267,483.09 267,630.41 302.59,666 405.16,666 534.56,536.6 U4.5
  Top Layer w30: BT1.2@329.5,289 327,291.5 260.5,291.5 162,390 162,1032 338,1208 BT1.2@338,1219.5
YELLOW_LED: R11.2 U1.13 | length 1340.7
  Bottom Layer w10: R11.2 1335,928.02 1577.28,1170.31 2022.15,1170.31 2032.48,1159.98 2066.65,1159.98 U1.13
pads on no net: U1.1 U1.5 U1.18 U1.19 U1.22 U1.23 U1.24 U1.32 U1.35 U1.38 U5.6 U5.7 U6.1 U6.5
copper on no net:
  other v2: 860,100 3025,100 860,1400 3025,1400

## Polygon pours and split planes (outlines as drawn)
GND on Bottom Layer "GND_L02_P000" (solid, remove dead copper, pour order 0): 3125,1501 3125,0 0,0 0,1501

## Other copper
Bottom Layer:
  region: 1934.47,683

## Silkscreen, mask and mechanical layers (free items; w line width, h text height)
Top Overlay:
  lines w10: 2779,678 2779,733
  text "RST" at 2079,1201 h60
  text "PWR" at 800,1187 h60
  text "RED" at 2884,893 h20
  text "IR" at 2901,609 h20
  text "TEMP" at 2944,495 h20 r90
  text "G  Y  R" at 1135,370 h60
  text "PulseOut COVID 2020 / Benchtop Pulse Oximeter V0 / C. Miller / N. Petrunyak" at 1662,67 h25
Board Outline (Mech6):
  the board outline again, w10